# Altium PCB PCBProx1.3.PcbDoc
Units mil, origin at the board's own origin, x right, y up, seen from the top; angles counter-clockwise.
Board outline 1055 x 1065 mil, 2 copper layers (Top Layer, Bottom Layer); 6 components, 5 nets, 23 pads, 4 vias.
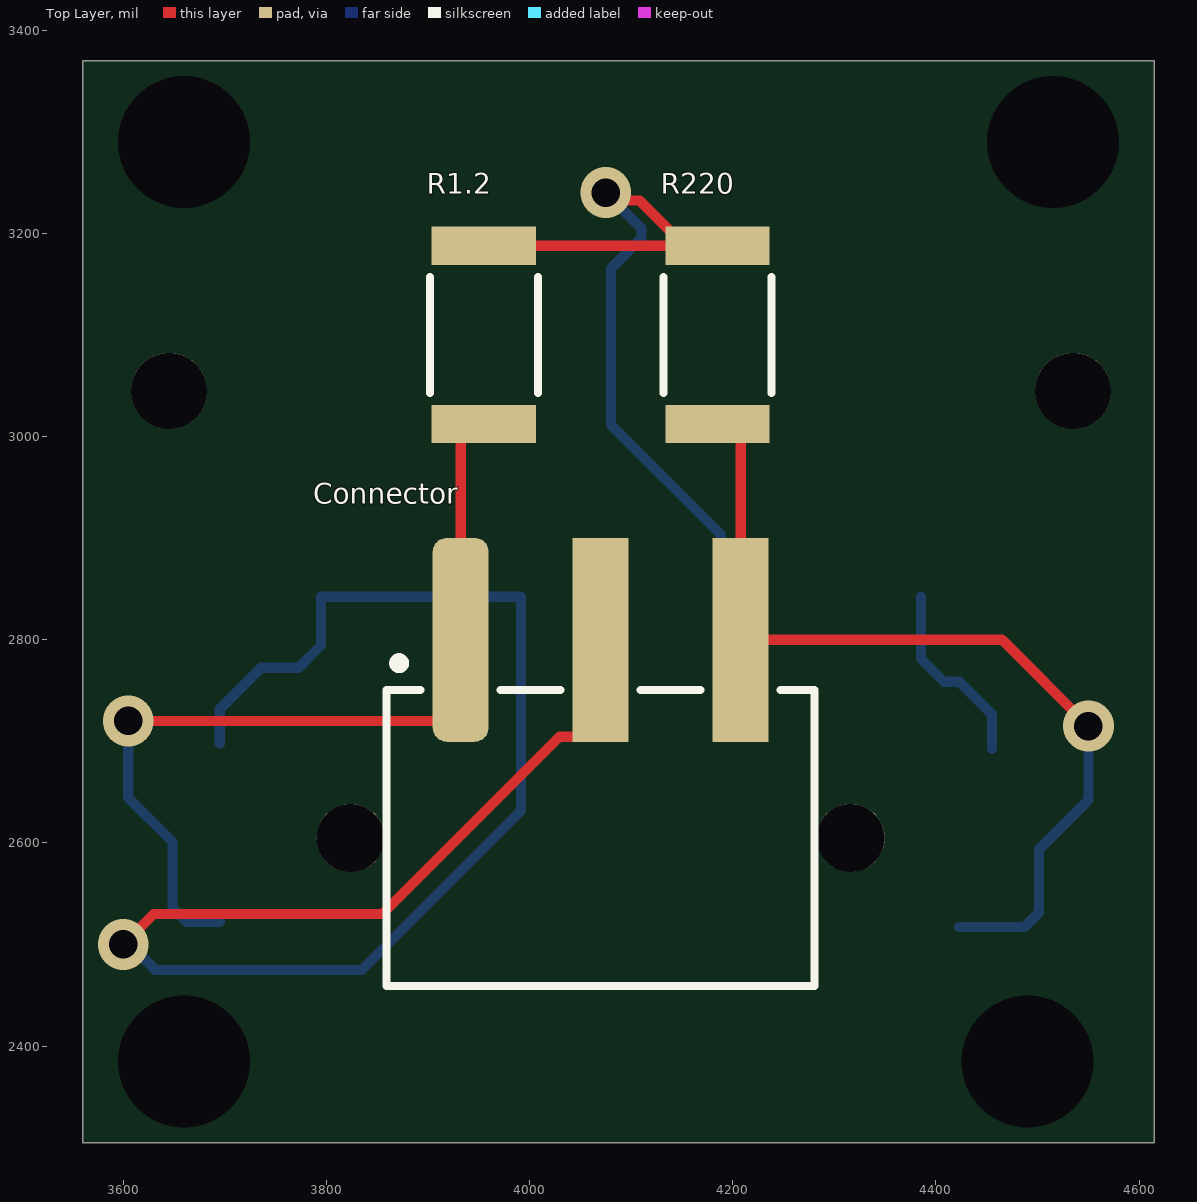
[diagram p0: Top Layer view]
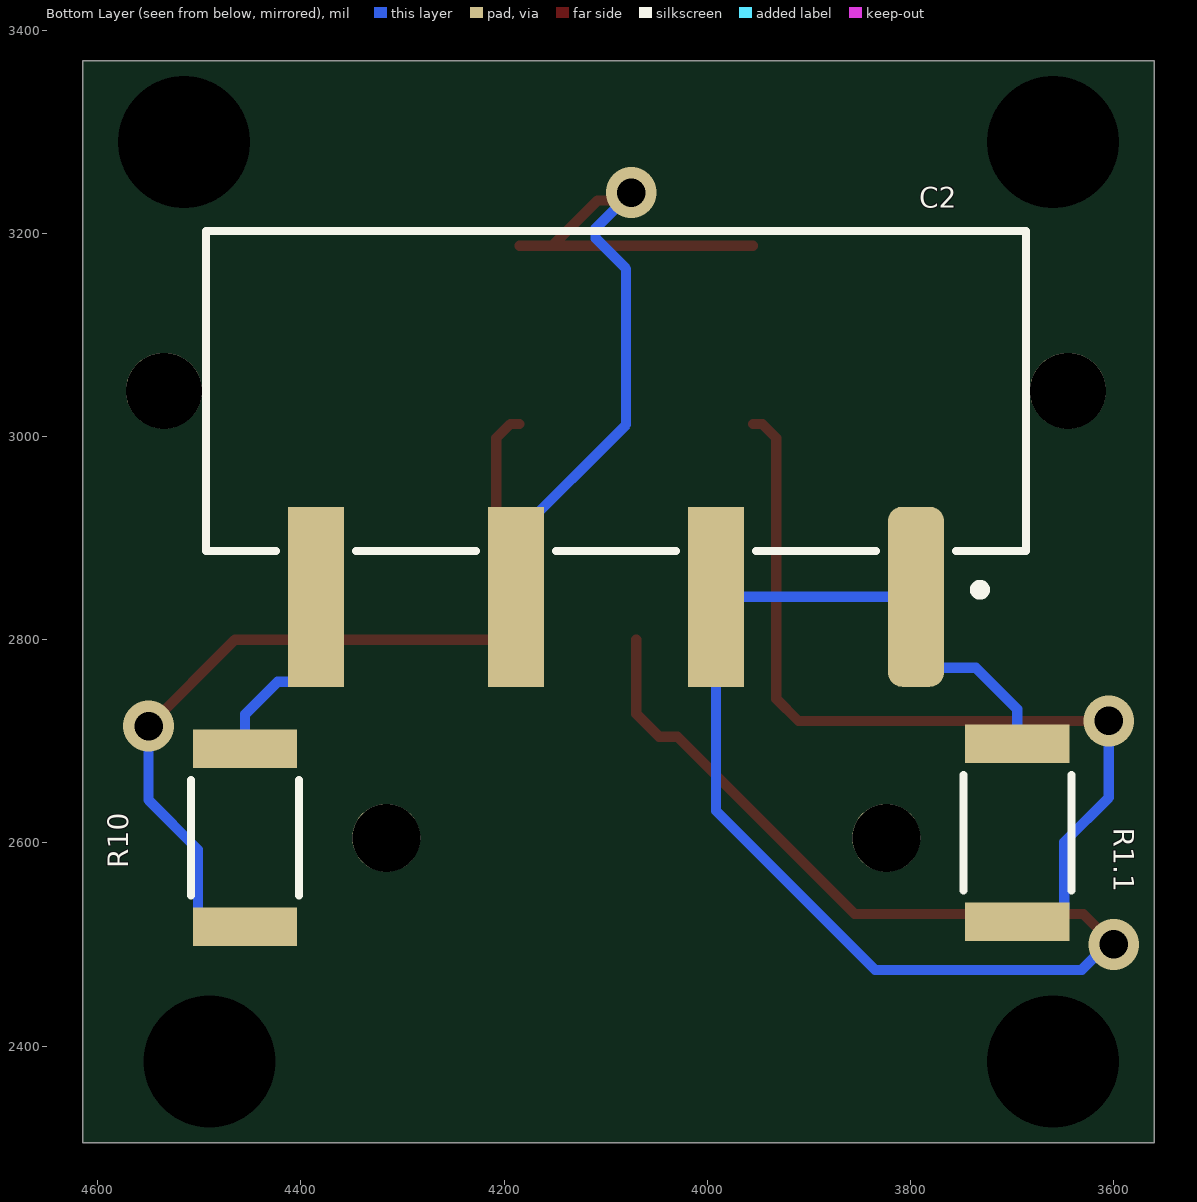
[diagram p1: Bottom Layer view, seen from below]
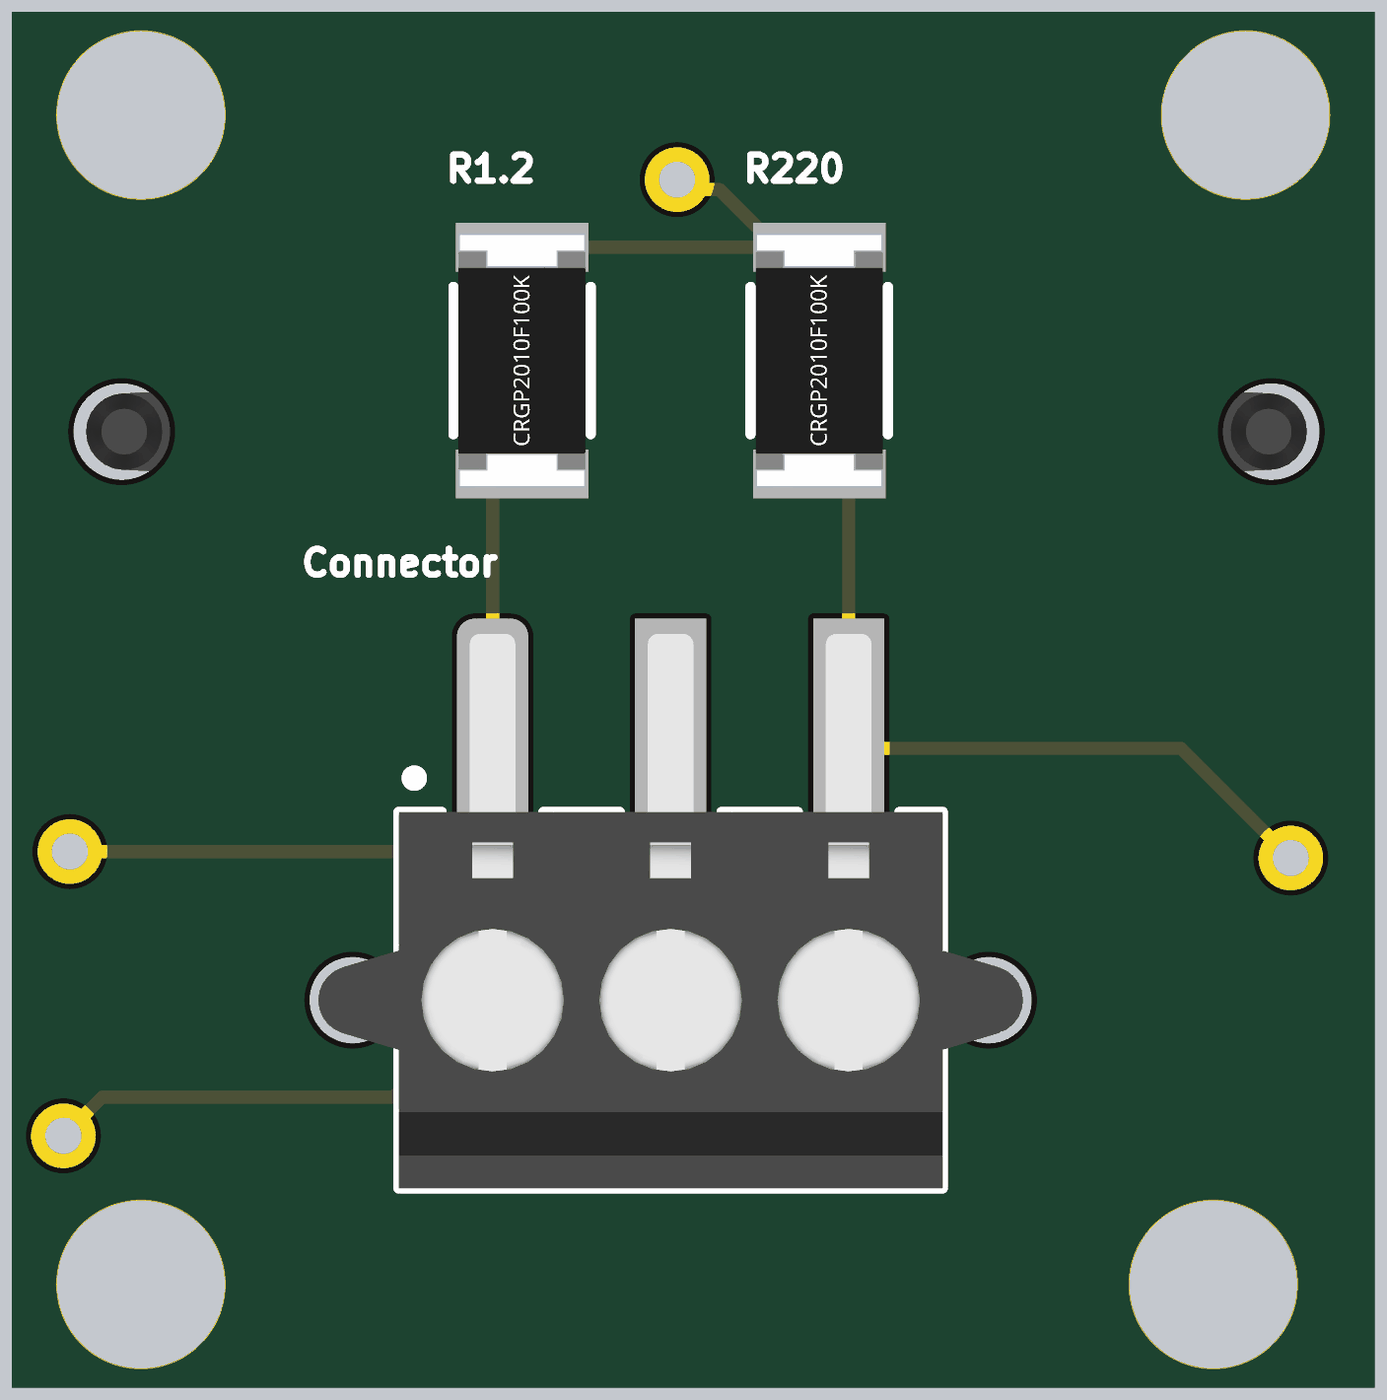
[diagram p2: 3D render of the assembled board from above, using the file's embedded part models]
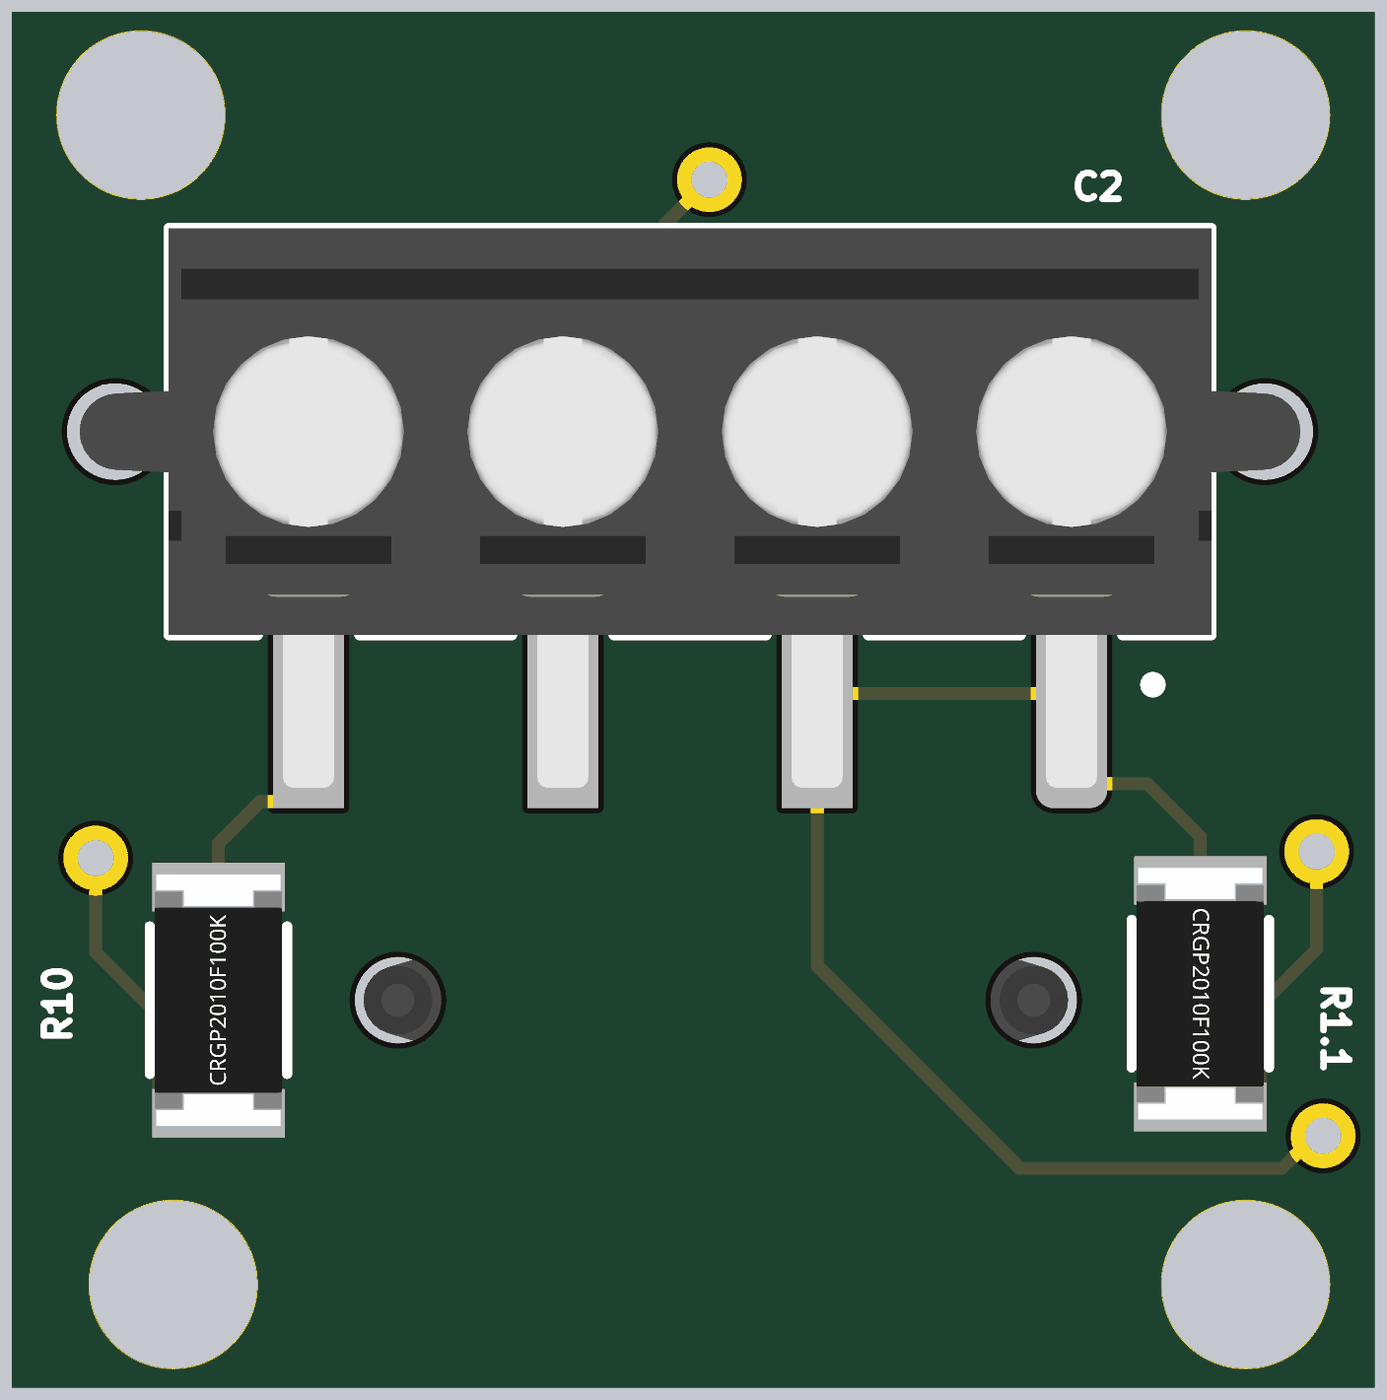
[diagram p3: 3D render of the assembled board from below, using the file's embedded part models]

## Layer stack, top to bottom
Top Solder: solder mask 0.4, Solder Resist, Dk 3.5
Top Layer: signal copper 1.4
Dielectric 1: dielectric 12.6, FR-4, Dk 4.8
Bottom Layer: signal copper 1.4
Bottom Solder: solder mask 0.4, Solder Resist, Dk 3.5

## Board outline
3560,2305 4615,2305 4615,3370 3560,3370

## Design rules (kind name [scope] priority, off if disabled: settings)
Clearance [All] p1: gap=10 ignorepadtopadclearanceinfootprint=FALSE except(0: Arc-Hole Track-Hole SMDPad-Hole THPad-Hole Via-Hole Fill-Hole Poly-Hole Region-Hole Text-Hole)
PolygonConnect [All] p1: connectstyle=Relief reliefconductorwidth=10 reliefentries=4 polygonreliefangle="90 Angle" airgapwidth=10
RoutingVias [All] p1: holewidth=28 width=50 viastyle="Through Hole" minholewidth=28 minwidth=50 maxholewidth=28 maxwidth=50
SolderMaskExpansion [All] p1: expansion=4 istentingtop=FALSE
Width [All] p1: maxlimit=10 minlimit=10 preferedwidth=10
30 further rules are at their usual default settings.

## Components (designator, comment, footprint, x,y, rotation, side; value= is the part's Value field where it differs from the comment)
C2 "691709710304" 691709710304 4090,3045 r0 bottom
Connector "691508110303" 691508110303 4070,2605 r0 top
R1.1 "CRGP2010F1K0" FP-CRGP2010-IPC_C 3695,2610 r270 bottom value=1KΩ
R1.2 "CRGP2010F1K0" FP-CRGP2010-IPC_C 3955,3100 r90 top value=1KΩ
R10 "CRGP2010F10K" FP-CRGP2010-IPC_C 4455,2605 r90 bottom value=10KΩ
R220 "CRGP2010F220R" FP-CRGP2010-IPC_C 4185,3100 r90 top value=220Ω

## Footprints (in the part's own frame and the unit in brackets; to place one, negate y for a bottom-side part, rotate by r counter-clockwise, add the part's x,y. Pads: shape width x height; smd on the part's side, far side on the other; paste and mask are expansions set on the pad)
691508110303 [mm] "WR-TBL Terminal block - serie 5081 3,50mm - SMT - Horizontal entry with rising clamp - 03p"
  rrect50% 1.4x5.1 smd: 1(-3.5,4.95)
  rect 1.4x5.1 smd: 2(0,4.95) 3(3.5,4.95)
  round 1.7 hole 1.7 unplated: M1(-6.25,0) M2(6.25,0)
  silkscreen extent -5.35,-3.7 5.35,4.49, body extent -6.92,-3.7 6.92,7.2, height 11.25
691709710304 [mm] "Horizontal Entry SMT with Pressure Clamp, pitch 5mm, 04p"
  rrect50% 1.4x4.5 smd: 1(-7.5,5.15)
  rect 1.4x4.5 smd: 2(-2.5,5.15) 3(2.5,5.15) 4(7.5,5.15)
  round 1.9 hole 1.9 unplated: M1(-11.3,0) M2(11.3,0)
  silkscreen extent -10.25,-4 10.25,5.1, body extent -12,-4 12,7, height 9.95
FP-CRGP2010-IPC_C [mil]
  rect 37.72x102.61 smd paste+0 mask+0: 1(-87.68,0) 2(87.68,0)
  silkscreen extent -57,-53 57,53, body extent -98,-49 98,49, height 26

## Part data
C2: library part CMP-1502-03337-2, Color=Black, Current=6A, Flammability Rating="UL94 V-0", Max Operating Temperature=130°C, Min Operating Temperature=-40°C, Voltage=300V, Connector Type=Screw, Contact Material=Nickel, Contact Plating=Tin, Current Rating=6A, Height=10.2mm, Housing Material=Nylon, Lead Pitch=5mm, Length=20mm, Mount="Surface Mount", NexarPartId=34171771, Number of contacts=4, Number of Levels=1, Number of Pins=4, Number of Positions=4, Number of Positions Per Level=4, Number of Rows=1, Packaging=Digi-Reel®, Pitch=5mm, Plating=Steel, REACH SVHC=Unknown, RoHS=Compliant, Termination=Screw, Voltage Rating=300V, Wire Gauge (Max)=30AWG, Wire Gauge (Min)=30AWG, Wire/Cable Gauge=30AWG
Connector: library part CMP-1502-02491-2, Color=Black, Current=10A, Max Operating Temperature=130°C, Min Operating Temperature=-40°C, Voltage=300V, Contact Plating=Tin, Housing Material=Polymer, Lead Pitch=3.5mm, Length=10.5mm, Mount="Surface Mount", NexarPartId=52645171, Number of Levels=1, Number of Pins=3, Number of Positions Per Level=3, Pitch=3.5mm, Plating="Brass, Steel, Tin", RoHS=Compliant, Termination=Screw, Wire Gauge (Max)=30AWG, Wire Gauge (Min)=16AWG
R1.1 R1.2: library part CMP-03211-005910-1, "CRGP2010 1KΩ 1.25W ±100ppm/°C 1% 400V", Ambient Temperature Range High=+70°C, Manufacturer=TE, Package=CRGP2010, Power Rating=1.25W, Resistance=1KΩ, Temperature="-55°C to +155°C", Temperature Coefficient=±100ppm/°C, Temperature Range High=+155°C, Temperature Range Low=-55°C, Tolerance=0.01, Voltage Rating=400V, Automotive=No, Category=Res, ComponentLink2Description=Datasheet, ComponentLink2URL=https://www.mouser.ca/datasheet/2/418/NG_DS_9-1773463-9_A-1358566.pdf, Composition="Thick Film", Device Class L1="Passive Components", Device Class L2=Resistors, Device Class L3="Chip SMD Resistors", Height=0.65mm, Ipc Land Pattern Name=RESC500250X55, Lead Free=Yes, Manufacturer Part Number=CRGP2010F1K0, Octopart=https://octopart.com/crgp2010f1k0-te+connectivity-91018979, RoHS=TRUE, Series=CRGP
R10: library part CMP-03211-005831-1, "CRGP2010 10KΩ 1.25W ±100ppm/°C 1% 400V", Ambient Temperature Range High=+70°C, Manufacturer=TE, Package=CRGP2010, Power Rating=1.25W, Resistance=10KΩ, Temperature="-55°C to +155°C", Temperature Coefficient=±100ppm/°C, Temperature Range High=+155°C, Temperature Range Low=-55°C, Tolerance=0.01, Voltage Rating=400V, Automotive=No, Category=Res, ComponentLink2Description=Datasheet, ComponentLink2URL=https://www.mouser.ca/datasheet/2/418/NG_DS_9-1773463-9_A-1358566.pdf, Composition="Thick Film", Device Class L1="Passive Components", Device Class L2=Resistors, Device Class L3="Chip SMD Resistors", Height=0.65mm, Ipc Land Pattern Name=RESC500250X55, Lead Free=Yes, Manufacturer Part Number=CRGP2010F10K, Octopart=https://octopart.com/crgp2010f10k-te+connectivity-91018965, RoHS=TRUE, Series=CRGP
R220: library part CMP-03211-004746-1, "CRGP2010 220Ω 1.25W ±100ppm/°C 1% 400V", Ambient Temperature Range High=+70°C, Manufacturer=TE, Package=CRGP2010, Power Rating=1.25W, Resistance=220Ω, Temperature="-55°C to +155°C", Temperature Coefficient=±100ppm/°C, Temperature Range High=+155°C, Temperature Range Low=-55°C, Tolerance=0.01, Voltage Rating=400V, Automotive=No, Category=Res, ComponentLink2Description=Datasheet, ComponentLink2URL=https://www.mouser.ca/datasheet/2/418/NG_DS_9-1773463-9_A-1358566.pdf, Composition="Thick Film", Device Class L1="Passive Components", Device Class L2=Resistors, Device Class L3="Chip SMD Resistors", Height=0.65mm, Ipc Land Pattern Name=RESC500250X55, Lead Free=Yes, Manufacturer Part Number=CRGP2010F220R, Octopart=https://octopart.com/crgp2010f220r-te+connectivity-91018985, RoHS=TRUE, Series=CRGP

## Free pads (board coordinates)
  round 60 hole 130: 1(3660,3290) 2(4515,3290) 3(3660,2385) 4(4490,2385)

## Via types
v1: diameter 50, hole 28, Top Layer to Bottom Layer, 4 vias

## Nets (pads, with @x,y where several pads share a name; then routed paths per layer and width w, separated by ;. In a path a pad name is that pad's centre, name@x,y a point inside that pad or via, vN(x,y) a via of type N, cw(c..) or ccw(c..) an arc to the next point about the centre after c; other vN are vias at no path point)
NetC2_1: C2.1 C2.2 Connector.2 R1.1.1 | length 1718.7
  Top Layer w10: v1(3600,2500) 3630,2530 3855,2530 4029.49,2704.49 4047.44,2704.49 4070,2727.05 Connector.2
  Bottom Layer w10: v1(3600,2500) 3606.57,2500 3631.57,2475 3835,2475 3991.57,2631.57 C2.2 C2.1 3794.72,2794.33 3772.83,2772.44 3735.9,2772.44 3695,2731.54 R1.1.1
NetC2_3: C2.3 R1.2.2 R220.2 | length 798.8
  Top Layer w10: R1.2.2 R220.2@4152.56,3187.68 ; v1(4075,3240) 4082.65,3232.35 4107.89,3232.35 R220.2@4152.56,3187.68 ; R220.2 R220.2@4152.56,3187.68
  Bottom Layer w10: v1(4075,3240) 4110,3205 4110,3195 4080,3165 4080,3011.69 4188.43,2903.27 C2.3
NetC2_4: C2.4 R10.2 | length 187.3
  Bottom Layer w10: C2.4 4385.28,2781.22 4407.83,2758.66 4422.88,2758.66 4455,2726.54 R10.2
NetConnector_1: Connector.1 R1.1.2 R1.2.1 | length 875.3
  Top Layer w10: v1(3605,2720) 3910.31,2720 3932.2,2741.89 Connector.1 3932.2,2998.46 3946.07,3012.32 R1.2.1
  Bottom Layer w10: v1(3605,2720) 3605,2644.53 3648.7,2600.83 3648.7,2536.18 3662.56,2522.32 R1.1.2
NetConnector_3: Connector.3 R10.1 R220.1 | length 893
  Top Layer w10: R220.1 4193.93,3012.32 4207.8,2998.46 Connector.3 4465.12,2799.88 v1(4550,2715)
  Bottom Layer w10: R10.1@4422.56,2517.32 4487.44,2517.32 4501.3,2531.18 4501.3,2593.33 4550,2642.03 v1(4550,2715)
pads on no net: C2.M1 C2.M2 Connector.M1 Connector.M2